# Altium PCB kk_sem_ultrahang_hw.PcbDoc
Units mil, origin at the board's own origin, x right, y up, seen from the top; angles counter-clockwise.
Board outline 3600 x 2100 mil, 2 copper layers (Top Layer, Bottom Layer); 45 components, 27 nets, 118 pads, 18 vias.
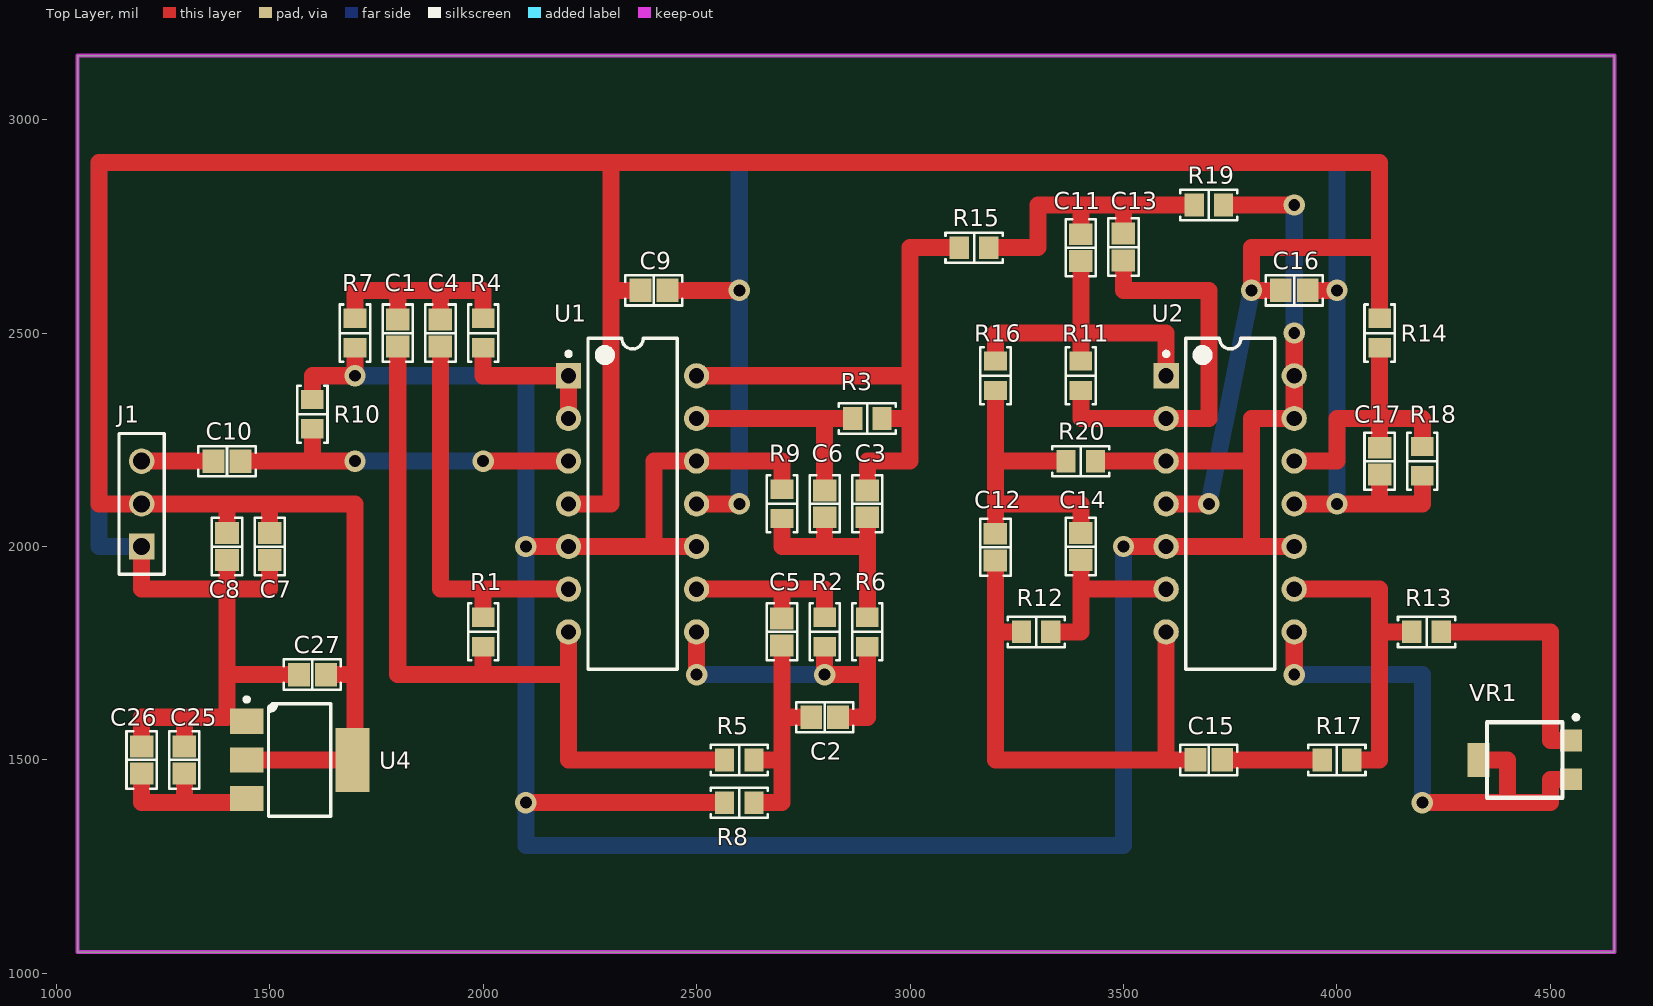
[diagram p0: Top Layer view]
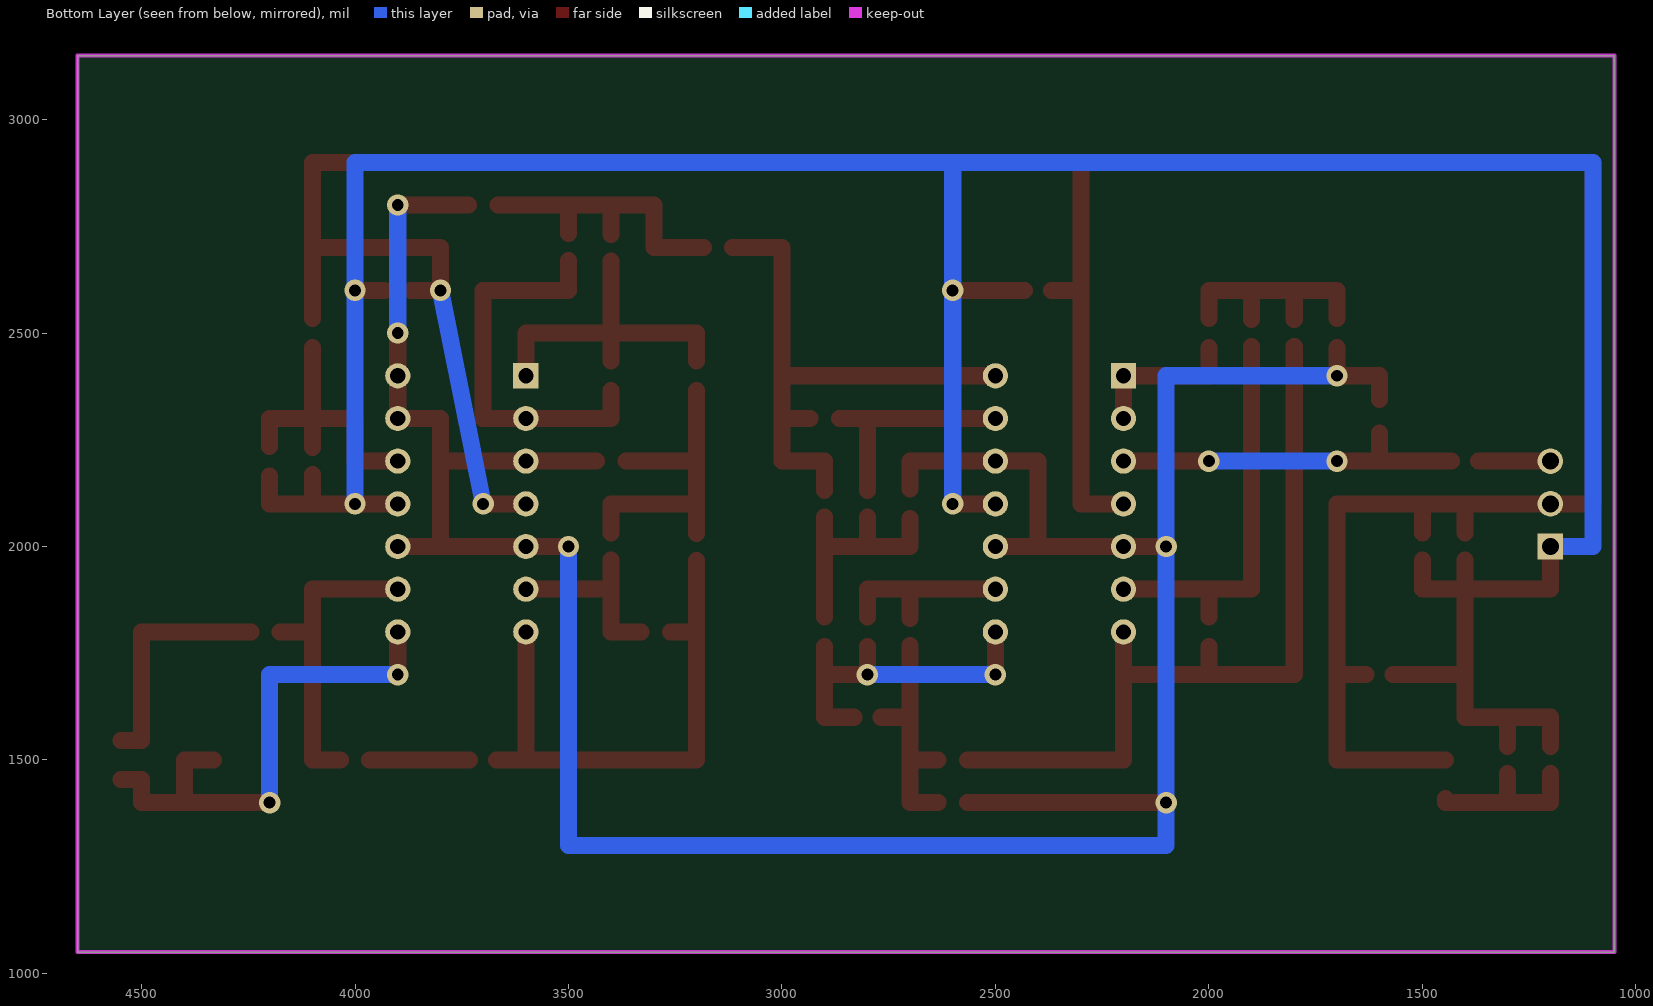
[diagram p1: Bottom Layer view, seen from below]
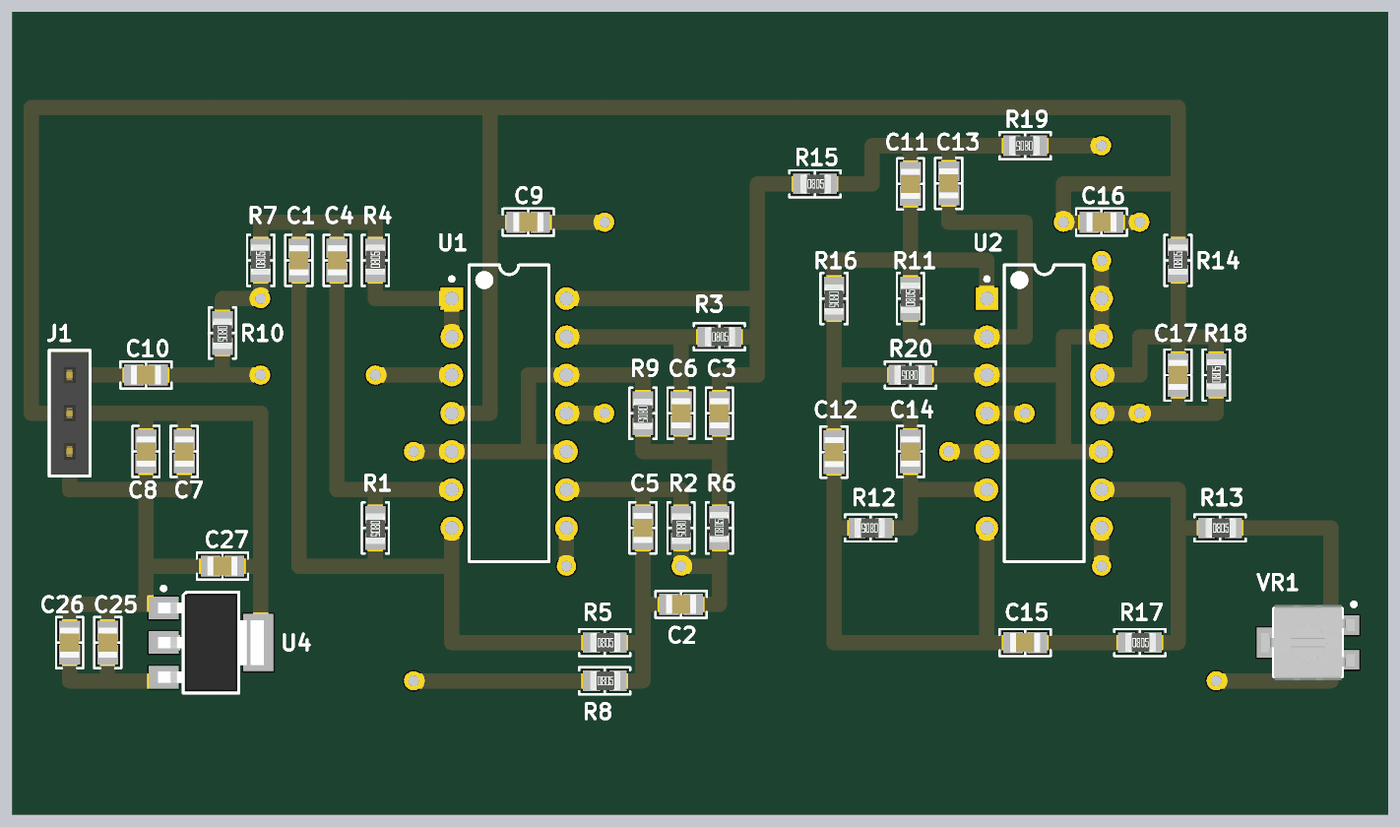
[diagram p2: 3D render of the assembled board from above, using the file's embedded part models]

## Layer stack, top to bottom
Top Solder: solder mask 0.4, Solder Resist, Dk 3.5
Top Layer: signal copper 1.4
Dielectric 1: dielectric 12.6, FR-4, Dk 4.8
Bottom Layer: signal copper 1.4
Bottom Solder: solder mask 0.4, Solder Resist, Dk 3.5

## Board outline
1050,1050 1050,3150 4650,3150 4650,1050

## Design rules (kind name [scope] priority, off if disabled: settings)
Clearance [All] p1: gap=10 ignorepadtopadclearanceinfootprint=FALSE except(0: Arc-Hole Track-Hole SMDPad-Hole THPad-Hole Via-Hole Fill-Hole Poly-Hole Region-Hole Text-Hole)
PolygonConnect [All] p1: connectstyle=Relief reliefconductorwidth=10 reliefentries=4 polygonreliefangle="90 Angle" airgapwidth=10
RoutingVias [All] p1: holewidth=28 width=50 viastyle="Through Hole" minholewidth=28 minwidth=50 maxholewidth=28 maxwidth=50
SolderMaskExpansion [All] p1: expansion=4 istentingtop=FALSE
Width [All] p1: maxlimit=40 minlimit=20 preferedwidth=40 minimp=50.000000 maximp=50.000000 favimp=50.000000
30 further rules are at their usual default settings.

## Components (designator, comment, footprint, x,y, rotation, side; value= is the part's Value field where it differs from the comment)
C1 "1nF" "CAP 0805_2012" 1800,2500 r270 top
C2 "1nF" "CAP 0805_2012" 2800,1600 r0 top
C3 "1nF" "CAP 0805_2012" 2900,2100 r90 top
C4 "1nF" "CAP 0805_2012" 1900,2500 r270 top
C5 "1nF" "CAP 0805_2012" 2700,1800 r90 top
C6 "1nF" "CAP 0805_2012" 2800,2100 r90 top
C7 "1µF" "CAP 0805_2012" 1500,2000 r90 top
C8 "100nF" "CAP 0805_2012" 1400,2000 r90 top
C9 "100nF" "CAP 0805_2012" 2400,2600 r180 top
C10 "1nF" "CAP 0805_2012" 1400,2200 r0 top
C11 "1nF" "CAP 0805_2012" 3400,2700 r270 top
C12 "1nF" "CAP 0805_2012" 3200,1998.5 r270 top
C13 "1nF" "CAP 0805_2012" 3500,2701.5 r270 top
C14 "1nF" "CAP 0805_2012" 3400,2000 r270 top
C15 "100nF" "CAP 0805_2012" 3700,1500 r180 top
C16 "100nF" "CAP 0805_2012" 3900,2600 r180 top
C17 "100nF" "CAP 0805_2012" 4100,2200 r90 top
C25 "10µF" "CAP 0805_2012" 1300,1500 r270 top
C26 "100nF" "CAP 0805_2012" 1200,1500 r270 top
C27 "10µF" "CAP 0805_2012" 1600,1700 r0 top
J1 "MIC" 61300311821 1200,2100 r90 top
R1 "16 kOhms" "RES 0805_2012" 2000,1800 r270 top
R2 "27 kOhms" "RES 0805_2012" 2800,1800 r270 top
R3 "39 kOhms" "RES 0805_2012" 2900,2300 r0 top
R4 "2.4 kOhms" "RES 0805_2012" 2000,2500 r90 top
R5 "6.8 kOhms" "RES 0805_2012" 2600,1500 r0 top
R6 "2.7 kOhms" "RES 0805_2012" 2900,1800 r90 top
R7 "1.1 kOhms" "RES 0805_2012" 1700,2500 r90 top
R8 "820 Ohms" "RES 0805_2012" 2600,1400 r0 top
R9 "150 Ohms" "RES 0805_2012" 2700,2100 r270 top
R10 "10 kOhms" "RES 0805_2012" 1600,2310 r270 top
R11 "91 kOhms" "RES 0805_2012" 3400,2400 r90 top
R12 "16 kOhms" "RES 0805_2012" 3295.55,1800 r180 top
R13 "1 kOhms" "RES 0805_2012" 4210,1800 r0 top
R14 "10 kOhms" "RES 0805_2012" 4100,2500 r90 top
R15 "6.2 kOhms" "RES 0805_2012" 3150,2700 r0 top
R16 "1.6 kOhms" "RES 0805_2012" 3200,2400 r270 top
R17 "1 kOhms" "RES 0805_2012" 4000,1500 r0 top
R18 "10 kOhms" "RES 0805_2012" 4200,2200 r90 top
R19 "330 Ohms" "RES 0805_2012" 3700,2800 r180 top
R20 "620 Ohms" "RES 0805_2012" 3400,2200 r180 top
U1 "TL974IN" TI-N14 2350,2100 r0 top
U2 "TL974IN" TI-N14 3750,2100 r0 top
U4 "LD1117S33TR" "ST SOT-223" 1570,1500 r0 top
VR1 "10 kOhms" "Bourns 3314G-1" 4440,1500 r270 top

## Footprints (in the part's own frame and the unit in brackets; to place one, negate y for a bottom-side part, rotate by r counter-clockwise, add the part's x,y. Pads: shape width x height; smd on the part's side, far side on the other; paste and mask are expansions set on the pad)
61300311821 [mm] "Socket Header, Pitch 2.54 mm, THT, Vertical, single row, 3p"
  rect 1.52x1.52 hole 1.02: 1(-2.54,0)
  round 1.52 hole 1.02: 2(0,0) 3(2.54,0)
  silkscreen extent -4.19,-1.35 4.19,1.35, body extent -4.06,-1.25 4.06,1.25, height 8.55
"Bourns 3314G-1" [mm]
  rect 1.3x1.3 smd: 1(-1.15,2.75) 3(1.15,2.75)
  rect 2x1.3 smd: 2(0,-2.75)
  silkscreen extent -2.67,-2.25 2.25,3.17, body extent -2.5,-3.1 2.5,3.1, height 2.7
"CAP 0805_2012" [mm] "Chip Capacitor, 2-Leads, Body 2.00x1.20mm, IPC Medium Density"
  rect 1.3x1.4 smd: 1(-0.8,0) 2(0.8,0)
  silkscreen extent -1.7,-0.9 1.7,0.9, body extent -1,-0.64 1,0.64, height 1.26
"RES 0805_2012" [mm] "Chip Resistor, 2-Leads, Body 2.00x1.25mm, IPC Medium Density"
  rect 1.15x1.35 smd: 1(-0.875,0) 2(0.875,0)
  silkscreen extent -1.7,-0.9 1.7,0.9, body extent -0.95,-0.62 1.05,0.63, height 0.6
"ST SOT-223" [mm] "SOT223, 4-Leads, Body 6.50x7.00mm (avg), Pitch 2.30mm, IPC Medium Density"
  rect 2x1.5 smd: 1(-3.15,2.3) 2(-3.15,0) 3(-3.15,-2.3)
  rect 2x3.8 smd: 4(3.15,0)
  silkscreen extent -3.27,-3.35 1.85,3.72, body extent -3.52,-3.25 3.5,3.25, height 1.8
TI-N14 [mm] "DIP, 14-Leads, Body 19.305x6.35 mm, Pitch 2.54 mm"
  rect 1.5x1.5 hole 0.9: 1(-3.81,7.62)
  round 1.5 hole 0.9: 2(-3.81,5.08) 3(-3.81,2.54) 4(-3.81,0) 5(-3.81,-2.54) 6(-3.81,-5.08) 7(-3.81,-7.62) 8(3.81,-7.62) 9(3.81,-5.08) 10(3.81,-2.54) 11(3.81,0) 12(3.81,2.54) 13(3.81,5.08) 14(3.81,7.62)
  silkscreen extent -3.93,-9.85 2.65,9.85, body extent -3.3,-9.85 3.3,9.85, height 5.08

## Part data
C1 C2 C3 C4 C5 C6 C10 C11 C12 C13 C14: library part C0805C102K5GACTU, "CAP CER 1000PF 50V C0G/NP0 0805", Capacitance=1000pF, Device Package="0805 (2012 Metric)", Manufacturer=KEMET, Operating Temperature="-55°C ~ 125°C", Supplier Part Number 1=399-7988-1-ND, Temperature Coefficient="C0G, NP0", Tolerance=±10%, Voltage - Rated=50V, Applications="General Purpose", ComponentLink1Description=Datasheet, ComponentLink1URL=https://api.kemet.com/component-edge/download/datasheet/C0805C102K5GACTU.pdf, ComponentLink2Description="DigiKey Link", ComponentLink2URL=http://digikey.com/product-detail/en/kemet/C0805C102K5GACTU/399-7988-1-ND/3471711, Features="Low ESL", LastUpdated="2020. 09. 02. 1:04:42", Lifecycle Status=Active, Minimum Order=1, Mounting Type="Surface Mount, MLCC", Package / Case="0805 (2012 Metric)", Packaging=TapeAndReel, Part Number=C0805C102K5GACTU, Part Status=Active, PartId=2543, Price=0.02, Series="SMD Comm C0G", Size / Dimension="0.079\" L x 0.049\" W (2.00mm x 1.25mm)", Supplier 1=DigiKey, Thickness (Max)="0.035\" (0.88mm)"
C7: library part C0805C105K4RACTU, "CAP CER 1UF 16V X7R 0805", Device Package="0805 (2012 Metric)", Manufacturer=KEMET, Operating Temperature="-55°C ~ 125°C", Supplier Part Number 1=399-1284-1-ND, Temperature Coefficient=X7R, Tolerance=±10%, Voltage - Rated=16V, Applications="Bypass, Decoupling", Capacitance=1µF, ComponentLink1Description=Datasheet, ComponentLink1URL=https://api.kemet.com/component-edge/download/datasheet/C0805C105K4RACTU.pdf, ComponentLink2Description="DigiKey Link", ComponentLink2URL=http://digikey.com/product-detail/en/kemet/C0805C105K4RACTU/399-1284-1-ND/416060, LastUpdated="2020. 09. 02. 1:04:42", Lifecycle Status=Active, Minimum Order=1, Mounting Type="Surface Mount, MLCC", Package / Case="0805 (2012 Metric)", Packaging=TapeAndReel, Part Number=C0805C105K4RACTU, Part Status=Active, PartId=2494, Price=0.02, Series="SMD Comm X7R", Size / Dimension="0.079\" L x 0.049\" W (2.00mm x 1.25mm)", Supplier 1=DigiKey, Thickness (Max)="0.039\" (1.00mm)"
C8 C9 C15 C16 C17 C26: library part CC0805MRX7R9BB104, "CAP CER 0.1UF 50V X7R 0805", Capacitance=0.1µF, Device Package="0805 (2012 Metric)", Manufacturer=Yageo, Operating Temperature="-55°C ~ 125°C", Supplier Part Number 1=311-4351-1-ND, Temperature Coefficient=X7R, Tolerance=±20%, Voltage - Rated=50V, Applications="General Purpose", ComponentLink1Description=Datasheet, ComponentLink1URL=https://www.yageo.com/upload/media/product/productsearch/datasheet/mlcc/UPY-GPHC_X7R_6.3V-to-50V_18.pdf, ComponentLink2Description="DigiKey Link", ComponentLink2URL=http://digikey.com/product-detail/en/yageo/CC0805MRX7R9BB104/311-4351-1-ND/8025440, LastUpdated="2020. 09. 02. 1:04:42", Lifecycle Status=Active, Minimum Order=1, Mounting Type="Surface Mount, MLCC", Package / Case="0805 (2012 Metric)", Packaging=TapeAndReel, Part Number=CC0805MRX7R9BB104, Part Status=Active, PartId=2475, Price=0.02, Series=CC, Size / Dimension="0.079\" L x 0.049\" W (2.00mm x 1.25mm)", Supplier 1=DigiKey, Thickness (Max)="0.037\" (0.95mm)"
C25 C27: library part CGA4J1X5R1C106K125AC, "CAP CER 10UF 16V X5R 0805", Device Package="0805 (2012 Metric)", Manufacturer="TDK Corporation", Operating Temperature="-55°C ~ 85°C", Ratings=AEC-Q200, Supplier Part Number 1=445-7883-1-ND, Temperature Coefficient=X5R, Tolerance=±10%, Voltage - Rated=16V, Applications=Automotive, Capacitance=10µF, ComponentLink1Description=Datasheet, ComponentLink1URL=https://product.tdk.com/info/en/catalog/datasheets/mlcc_automotive_general_en.pdf?ref_disty=digikey, ComponentLink2Description="DigiKey Link", ComponentLink2URL=http://digikey.com/product-detail/en/tdk-corporation/CGA4J1X5R1C106K125AC/445-7883-1-ND/2781387, LastUpdated="2020. 09. 02. 1:04:41", Lifecycle Status=Active, Minimum Order=1, Mounting Type="Surface Mount, MLCC", Package / Case="0805 (2012 Metric)", Packaging=TapeAndReel, Part Number=CGA4J1X5R1C106K125AC, Part Status=Active, PartId=3076, Price=0.11, Series=CGA, Size / Dimension="0.079\" L x 0.049\" W (2.00mm x 1.25mm)", Supplier 1=DigiKey, Thickness (Max)="0.057\" (1.45mm)"
J1: library part 61300311821, "WR-PHD Socket Header, THT, pitch 2.54mm, Single Row, Vertical, 3p", Contact Resistance=20mOhm, Manufacturer="Wurth Elektronik", Operating Temperature="-40 to +125degC", Rated Current=3A, Withstanding Voltage=500VAC, Working Voltage=250VAC, ComponentLink1Description=Manufacturer, ComponentLink1URL=http://www.we-online.de, ComponentLink2Description=Datasheet, ComponentLink2URL=https://www.we-online.com/catalog/datasheet/61300311821.pdf, Gender="Socket Header", Manufacturer Part Number=61300311821, Mounting Technology=THT, Orientation=Vertical, Packaging=Tray, Pin Number=3, Pitch=2.54mm, Published Date="May 2020", Row Number=Single
R1 R12: library part CRCW080516K0FKEA, "RES SMD 16K OHM 1% 1/8W 0805", Device Package="0805 (2012 Metric)", Manufacturer="Vishay Dale", Operating Temperature="-55°C ~ 155°C", Power (Watts)="0.125W, 1/8W", Ratings=AEC-Q200, Supplier Device Package=0805, Supplier Part Number 1=541-16.0KCCT-ND, Temperature Coefficient=±100ppm/°C, Tolerance=±1%, ComponentLink1Description=Datasheet, ComponentLink1URL=http://www.vishay.com/docs/20035/dcrcwe3.pdf, ComponentLink2Description="DigiKey Link", ComponentLink2URL=http://digikey.com/product-detail/en/vishay-dale/CRCW080516K0FKEA/541-16.0KCCT-ND/1180918, Composition="Thick Film", Features="Automotive AEC-Q200", Height - Seated (Max)="0.020\" (0.50mm)", LastUpdated="2020. 09. 02. 1:15:13", Lifecycle Status=Active, Minimum Order=1, Number of Terminations=2, Package / Case="0805 (2012 Metric)", Packaging=TapeAndReel, Part Number=CRCW080516K0FKEA, Part Status=Active, PartId=32798, Price=0.01, Resistance="16 kOhms", Series=CRCW, Size / Dimension="0.079\" L x 0.049\" W (2.00mm x 1.25mm)", Supplier 1=DigiKey
R2: library part ERJ-6ENF2702V, "RES SMD 27K OHM 1% 1/8W 0805", Device Package="0805 (2012 Metric)", Manufacturer="Panasonic Electronic Components", Operating Temperature="-55°C ~ 155°C", Power (Watts)="0.125W, 1/8W", Ratings=AEC-Q200, Supplier Device Package=0805, Supplier Part Number 1=P27.0KCCT-ND, Temperature Coefficient=±100ppm/°C, Tolerance=±1%, ComponentLink1Description=Datasheet, ComponentLink1URL=https://industrial.panasonic.com/cdbs/www-data/pdf/RDA0000/AOA0000C304.pdf, ComponentLink2Description="DigiKey Link", ComponentLink2URL=http://digikey.com/product-detail/en/panasonic-electronic-components/ERJ-6ENF2702V/P27.0KCCT-ND/1746843, Composition="Thick Film", Features="Automotive AEC-Q200", Height - Seated (Max)="0.028\" (0.70mm)", LastUpdated="2020. 09. 02. 1:15:19", Lifecycle Status=Active, Minimum Order=1, Number of Terminations=2, Package / Case="0805 (2012 Metric)", Packaging=TapeAndReel, Part Number=ERJ-6ENF2702V, Part Status=Active, PartId=30271, Price=0.01, Resistance="27 kOhms", Series=ERJ, Size / Dimension="0.079\" L x 0.049\" W (2.00mm x 1.25mm)", Supplier 1=DigiKey
R3: library part AC0805FR-0739KL, "RES SMD 39K OHM 1% 1/8W 0805", Device Package="0805 (2012 Metric)", Manufacturer=Yageo, Operating Temperature="-55°C ~ 155°C", Power (Watts)="0.125W, 1/8W", Ratings=AEC-Q200, Supplier Device Package=0805, Supplier Part Number 1=YAG3727CT-ND, Temperature Coefficient=±100ppm/°C, Tolerance=±1%, ComponentLink1Description=Datasheet, ComponentLink1URL=https://www.yageo.com/upload/media/product/productsearch/datasheet/rchip/PYu-AC_51_RoHS_L_7.pdf, ComponentLink2Description="DigiKey Link", ComponentLink2URL=http://digikey.com/product-detail/en/yageo/AC0805FR-0739KL/YAG3727CT-ND/6006576, Composition="Thick Film", Features="Automotive AEC-Q200, Moisture Resistant", Height - Seated (Max)="0.024\" (0.60mm)", LastUpdated="2020. 09. 02. 1:15:24", Lifecycle Status=Active, Minimum Order=1, Number of Terminations=2, Package / Case="0805 (2012 Metric)", Packaging=TapeAndReel, Part Number=AC0805FR-0739KL, Part Status=Active, PartId=27853, Price=0.01, Resistance="39 kOhms", Series=AC, Size / Dimension="0.079\" L x 0.049\" W (2.00mm x 1.25mm)", Supplier 1=DigiKey
R4: library part KTR10EZPF2401, "RES SMD 2.4K OHM 1% 1/8W 0805", Device Package="0805 (2012 Metric)", Manufacturer="Rohm Semiconductor", Operating Temperature="-55°C ~ 155°C", Power (Watts)="0.125W, 1/8W", Ratings=AEC-Q200, Supplier Device Package=0805, Supplier Part Number 1=RHM2.4KAHCT-ND, Temperature Coefficient=±100ppm/°C, Tolerance=±1%, ComponentLink1Description=Datasheet, ComponentLink1URL=https://www.rohm.com/datasheet/KTR03EZPF/ktr-e, ComponentLink2Description="DigiKey Link", ComponentLink2URL=http://digikey.com/product-detail/en/rohm-semiconductor/KTR10EZPF2401/RHM2.4KAHCT-ND/4054431, Composition="Thick Film", Features="Automotive AEC-Q200, High Voltage", Height - Seated (Max)="0.026\" (0.65mm)", LastUpdated="2020. 09. 02. 1:15:21", Lifecycle Status=Active, Minimum Order=1, Number of Terminations=2, Package / Case="0805 (2012 Metric)", Packaging=TapeAndReel, Part Number=KTR10EZPF2401, Part Status=Active, PartId=29182, Price=0.02, Resistance="2.4 kOhms", Series=KTR, Size / Dimension="0.079\" L x 0.049\" W (2.00mm x 1.25mm)", Supplier 1=DigiKey
R5: library part ERJ-6ENF6801V, "RES SMD 6.8K OHM 1% 1/8W 0805", Device Package="0805 (2012 Metric)", Manufacturer="Panasonic Electronic Components", Operating Temperature="-55°C ~ 155°C", Power (Watts)="0.125W, 1/8W", Ratings=AEC-Q200, Supplier Device Package=0805, Supplier Part Number 1=P6.80KCCT-ND, Temperature Coefficient=±100ppm/°C, Tolerance=±1%, ComponentLink1Description=Datasheet, ComponentLink1URL=https://industrial.panasonic.com/cdbs/www-data/pdf/RDA0000/AOA0000C304.pdf, ComponentLink2Description="DigiKey Link", ComponentLink2URL=http://digikey.com/product-detail/en/panasonic-electronic-components/ERJ-6ENF6801V/P6.80KCCT-ND/1746892, Composition="Thick Film", Features="Automotive AEC-Q200", Height - Seated (Max)="0.028\" (0.70mm)", LastUpdated="2020. 09. 02. 1:15:19", Lifecycle Status=Active, Minimum Order=1, Number of Terminations=2, Package / Case="0805 (2012 Metric)", Packaging=TapeAndReel, Part Number=ERJ-6ENF6801V, Part Status=Active, PartId=30159, Price=0.01, Resistance="6.8 kOhms", Series=ERJ, Size / Dimension="0.079\" L x 0.049\" W (2.00mm x 1.25mm)", Supplier 1=DigiKey
R6: library part CR0805-FX-2701ELF, "RES SMD 2.7K OHM 1% 1/8W 0805", Device Package="0805 (2012 Metric)", Manufacturer="Bourns Inc.", Operating Temperature="-55°C ~ 155°C", Power (Watts)="0.125W, 1/8W", Supplier Device Package=0805, Supplier Part Number 1=CR0805-FX-2701ELFCT-ND, Temperature Coefficient=±100ppm/°C, Tolerance=±1%, ComponentLink1Description=Datasheet, ComponentLink1URL=https://www.bourns.com/docs/Product-Datasheets/CHPREZTR.pdf, ComponentLink2Description="DigiKey Link", ComponentLink2URL=http://digikey.com/product-detail/en/bourns-inc/CR0805-FX-2701ELF/CR0805-FX-2701ELFCT-ND/4247920, Composition="Thick Film", Features="Moisture Resistant", Height - Seated (Max)="0.024\" (0.60mm)", LastUpdated="2020. 09. 02. 1:15:14", Lifecycle Status=Active, Minimum Order=1, Number of Terminations=2, Package / Case="0805 (2012 Metric)", Packaging=CutTape, Part Number=CR0805-FX-2701ELF, Part Status=Active, PartId=32518, Price=0.10, Resistance="2.7 kOhms", Series=CR0805, Size / Dimension="0.079\" L x 0.049\" W (2.00mm x 1.25mm)", Supplier 1=DigiKey
R7: library part RMCF0805FG1K10, "RES 1.1K OHM 1% 1/8W 0805", Device Package="0805 (2012 Metric)", Manufacturer="Stackpole Electronics Inc", Operating Temperature="-55°C ~ 155°C", Power (Watts)="0.125W, 1/8W", Ratings=AEC-Q200, Supplier Device Package=0805, Supplier Part Number 1=RMCF0805FG1K10CT-ND, Temperature Coefficient=±100ppm/°C, Tolerance=±1%, ComponentLink1Description=Datasheet, ComponentLink1URL=https://www.seielect.com/catalog/sei-rmcf_rmcp.pdf, ComponentLink2Description="DigiKey Link", ComponentLink2URL=http://digikey.com/product-detail/en/stackpole-electronics-inc/RMCF0805FG1K10/RMCF0805FG1K10CT-ND/4425147, Composition="Thick Film", Features="Automotive AEC-Q200", Height - Seated (Max)="0.026\" (0.65mm)", LastUpdated="2020. 09. 02. 1:15:22", Lifecycle Status=Active, Minimum Order=1, Number of Terminations=2, Package / Case="0805 (2012 Metric)", Packaging=CutTape, Part Number=RMCF0805FG1K10, Part Status=Active, PartId=28907, Price=0.10, Resistance="1.1 kOhms", Series=RMCF, Size / Dimension="0.079\" L x 0.049\" W (2.00mm x 1.25mm)", Supplier 1=DigiKey
R8: library part RMCF0805FT820R, "RES 820 OHM 1% 1/8W 0805", Device Package="0805 (2012 Metric)", Manufacturer="Stackpole Electronics Inc", Operating Temperature="-55°C ~ 155°C", Power (Watts)="0.125W, 1/8W", Ratings=AEC-Q200, Supplier Device Package=0805, Supplier Part Number 1=RMCF0805FT820RCT-ND, Temperature Coefficient=±100ppm/°C, Tolerance=±1%, ComponentLink1Description=Datasheet, ComponentLink1URL=https://www.seielect.com/catalog/sei-rmcf_rmcp.pdf, ComponentLink2Description="DigiKey Link", ComponentLink2URL=http://digikey.com/product-detail/en/stackpole-electronics-inc/RMCF0805FT820R/RMCF0805FT820RCT-ND/2418471, Composition="Thick Film", Features="Automotive AEC-Q200", Height - Seated (Max)="0.026\" (0.65mm)", LastUpdated="2020. 09. 02. 1:15:14", Lifecycle Status=Active, Minimum Order=1, Number of Terminations=2, Package / Case="0805 (2012 Metric)", Packaging=CutTape, Part Number=RMCF0805FT820R, Part Status=Active, PartId=32515, Price=0.10, Resistance="820 Ohms", Series=RMCF, Size / Dimension="0.079\" L x 0.049\" W (2.00mm x 1.25mm)", Supplier 1=DigiKey
R9: library part RMCF0805FT150R, "RES 150 OHM 1% 1/8W 0805", Device Package="0805 (2012 Metric)", Manufacturer="Stackpole Electronics Inc", Operating Temperature="-55°C ~ 155°C", Power (Watts)="0.125W, 1/8W", Ratings=AEC-Q200, Supplier Device Package=0805, Supplier Part Number 1=RMCF0805FT150RCT-ND, Temperature Coefficient=±100ppm/°C, Tolerance=±1%, ComponentLink1Description=Datasheet, ComponentLink1URL=https://www.seielect.com/catalog/sei-rmcf_rmcp.pdf, ComponentLink2Description="DigiKey Link", ComponentLink2URL=http://digikey.com/product-detail/en/stackpole-electronics-inc/RMCF0805FT150R/RMCF0805FT150RCT-ND/1942337, Composition="Thick Film", Features="Automotive AEC-Q200", Height - Seated (Max)="0.026\" (0.65mm)", LastUpdated="2020. 09. 02. 1:15:14", Lifecycle Status=Active, Minimum Order=1, Number of Terminations=2, Package / Case="0805 (2012 Metric)", Packaging=CutTape, Part Number=RMCF0805FT150R, Part Status=Active, PartId=32414, Price=0.10, Resistance="150 Ohms", Series=RMCF, Size / Dimension="0.079\" L x 0.049\" W (2.00mm x 1.25mm)", Supplier 1=DigiKey
R10 R14 R18: library part CRGCQ0805F10K, "CRGCQ 0805 10K 1%", Device Package="0805 (2012 Metric)", Manufacturer="TE Connectivity Passive Product", Operating Temperature="-55°C ~ 155°C", Power (Watts)="0.125W, 1/8W", Ratings=AEC-Q200, Supplier Device Package=0805, Supplier Part Number 1=A129761CT-ND, Temperature Coefficient=±100ppm/°C, Tolerance=±1%, ComponentLink1Description=Datasheet, ComponentLink1URL=https://www.te.com/commerce/DocumentDelivery/DDEController?Action=srchrtrv&DocNm=1773204-3&DocType=DS&DocLang=English, ComponentLink2Description="DigiKey Link", ComponentLink2URL=http://digikey.com/product-detail/en/te-connectivity-passive-product/CRGCQ0805F10K/A129761CT-ND/8577593, Composition="Thick Film", Features="Automotive AEC-Q200, Moisture Resistant", Height - Seated (Max)="0.026\" (0.65mm)", LastUpdated="2020. 09. 02. 1:14:36", Lifecycle Status=Active, Minimum Order=1, Number of Terminations=2, Package / Case="0805 (2012 Metric)", Packaging=TapeAndReel, Part Number=CRGCQ0805F10K, Part Status=Active, PartId=47653, Price=0.01, Resistance="10 kOhms", Series=CRGCQ, Size / Dimension="0.079\" L x 0.049\" W (2.00mm x 1.25mm)", Supplier 1=DigiKey
R11: library part CRCW080591K0FKEA, "RES SMD 91K OHM 1% 1/8W 0805", Device Package="0805 (2012 Metric)", Manufacturer="Vishay Dale", Operating Temperature="-55°C ~ 155°C", Power (Watts)="0.125W, 1/8W", Ratings=AEC-Q200, Supplier Device Package=0805, Supplier Part Number 1=541-91.0KCCT-ND, Temperature Coefficient=±100ppm/°C, Tolerance=±1%, ComponentLink1Description=Datasheet, ComponentLink1URL=http://www.vishay.com/docs/20035/dcrcwe3.pdf, ComponentLink2Description="DigiKey Link", ComponentLink2URL=http://digikey.com/product-detail/en/vishay-dale/CRCW080591K0FKEA/541-91.0KCCT-ND/1181009, Composition="Thick Film", Features="Automotive AEC-Q200", Height - Seated (Max)="0.020\" (0.50mm)", LastUpdated="2020. 09. 02. 1:15:06", Lifecycle Status=Active, Minimum Order=1, Number of Terminations=2, Package / Case="0805 (2012 Metric)", Packaging=TapeAndReel, Part Number=CRCW080591K0FKEA, Part Status=Active, PartId=35946, Price=0.01, Resistance="91 kOhms", Series=CRCW, Size / Dimension="0.079\" L x 0.049\" W (2.00mm x 1.25mm)", Supplier 1=DigiKey
R13 R17: library part CRCW08051K00FKEA, "RES SMD 1K OHM 1% 1/8W 0805", Device Package="0805 (2012 Metric)", Manufacturer="Vishay Dale", Operating Temperature="-55°C ~ 155°C", Power (Watts)="0.125W, 1/8W", Ratings=AEC-Q200, Supplier Device Package=0805, Supplier Part Number 1=541-1.00KCCT-ND, Temperature Coefficient=±100ppm/°C, Tolerance=±1%, ComponentLink1Description=Datasheet, ComponentLink1URL=http://www.vishay.com/docs/20035/dcrcwe3.pdf, ComponentLink2Description="DigiKey Link", ComponentLink2URL=http://digikey.com/product-detail/en/vishay-dale/CRCW08051K00FKEA/541-1.00KCCT-ND/1180783, Composition="Thick Film", Features="Automotive AEC-Q200", Height - Seated (Max)="0.020\" (0.50mm)", LastUpdated="2020. 09. 02. 1:15:23", Lifecycle Status=Active, Minimum Order=1, Number of Terminations=2, Package / Case="0805 (2012 Metric)", Packaging=TapeAndReel, Part Number=CRCW08051K00FKEA, Part Status=Active, PartId=28103, Price=0.01, Resistance="1 kOhms", Series=CRCW, Size / Dimension="0.079\" L x 0.049\" W (2.00mm x 1.25mm)", Supplier 1=DigiKey
R15: library part RMCF0805FT6K20, "RES 6.2K OHM 1% 1/8W 0805", Device Package="0805 (2012 Metric)", Manufacturer="Stackpole Electronics Inc", Operating Temperature="-55°C ~ 155°C", Power (Watts)="0.125W, 1/8W", Ratings=AEC-Q200, Supplier Device Package=0805, Supplier Part Number 1=RMCF0805FT6K20CT-ND, Temperature Coefficient=±100ppm/°C, Tolerance=±1%, ComponentLink1Description=Datasheet, ComponentLink1URL=https://www.seielect.com/catalog/sei-rmcf_rmcp.pdf, ComponentLink2Description="DigiKey Link", ComponentLink2URL=http://digikey.com/product-detail/en/stackpole-electronics-inc/RMCF0805FT6K20/RMCF0805FT6K20CT-ND/2418453, Composition="Thick Film", Features="Automotive AEC-Q200", Height - Seated (Max)="0.026\" (0.65mm)", LastUpdated="2020. 09. 02. 1:15:14", Lifecycle Status=Active, Minimum Order=1, Number of Terminations=2, Package / Case="0805 (2012 Metric)", Packaging=CutTape, Part Number=RMCF0805FT6K20, Part Status=Active, PartId=32585, Price=0.10, Resistance="6.2 kOhms", Series=RMCF, Size / Dimension="0.079\" L x 0.049\" W (2.00mm x 1.25mm)", Supplier 1=DigiKey
R16: library part AC0805FR-071K6L, "RES SMD 1.6K OHM 1% 1/8W 0805", Device Package="0805 (2012 Metric)", Manufacturer=Yageo, Operating Temperature="-55°C ~ 155°C", Power (Watts)="0.125W, 1/8W", Ratings=AEC-Q200, Supplier Device Package=0805, Supplier Part Number 1=YAG5709CT-ND, Temperature Coefficient=±100ppm/°C, Tolerance=±1%, ComponentLink1Description=Datasheet, ComponentLink1URL=https://www.yageo.com/upload/media/product/productsearch/datasheet/rchip/PYu-AC_51_RoHS_L_7.pdf, ComponentLink2Description="DigiKey Link", ComponentLink2URL=http://digikey.com/product-detail/en/yageo/AC0805FR-071K6L/YAG5709CT-ND/7648586, Composition="Thick Film", Features="Automotive AEC-Q200, Moisture Resistant", Height - Seated (Max)="0.024\" (0.60mm)", LastUpdated="2020. 09. 02. 1:15:15", Lifecycle Status=Active, Minimum Order=1, Number of Terminations=2, Package / Case="0805 (2012 Metric)", Packaging=TapeAndReel, Part Number=AC0805FR-071K6L, Part Status=Active, PartId=31712, Price=0.01, Resistance="1.6 kOhms", Series=AC, Size / Dimension="0.079\" L x 0.049\" W (2.00mm x 1.25mm)", Supplier 1=DigiKey
R19: library part RC0805FR-07330RL, "RES SMD 330 OHM 1% 1/8W 0805", Device Package="0805 (2012 Metric)", Manufacturer=Yageo, Operating Temperature="-55°C ~ 155°C", Power (Watts)="0.125W, 1/8W", Supplier Device Package=0805, Supplier Part Number 1=311-330CRCT-ND, Temperature Coefficient=±100ppm/°C, Tolerance=±1%, ComponentLink1Description=Datasheet, ComponentLink1URL=https://www.yageo.com/upload/media/product/productsearch/datasheet/rchip/PYu-RC_Group_51_RoHS_L_10.pdf, ComponentLink2Description="DigiKey Link", ComponentLink2URL=http://digikey.com/product-detail/en/yageo/RC0805FR-07330RL/311-330CRCT-ND/730813, Composition="Thick Film", Features="Moisture Resistant", Height - Seated (Max)="0.024\" (0.60mm)", LastUpdated="2020. 09. 02. 1:15:14", Lifecycle Status=Active, Minimum Order=1, Number of Terminations=2, Package / Case="0805 (2012 Metric)", Packaging=CutTape, Part Number=RC0805FR-07330RL, Part Status=Active, PartId=32600, Price=0.10, Resistance="330 Ohms", Series=RC, Size / Dimension="0.079\" L x 0.049\" W (2.00mm x 1.25mm)", Supplier 1=DigiKey
R20: library part KTR10EZPF6200, "RES SMD 620 OHM 1% 1/8W 0805", Device Package="0805 (2012 Metric)", Manufacturer="Rohm Semiconductor", Operating Temperature="-55°C ~ 155°C", Power (Watts)="0.125W, 1/8W", Ratings=AEC-Q200, Supplier Device Package=0805, Supplier Part Number 1=RHM620AHCT-ND, Temperature Coefficient=±100ppm/°C, Tolerance=±1%, ComponentLink1Description=Datasheet, ComponentLink1URL=https://www.rohm.com/datasheet/KTR03EZPF/ktr-e, ComponentLink2Description="DigiKey Link", ComponentLink2URL=http://digikey.com/product-detail/en/rohm-semiconductor/KTR10EZPF6200/RHM620AHCT-ND/4054660, Composition="Thick Film", Features="Automotive AEC-Q200, High Voltage", Height - Seated (Max)="0.026\" (0.65mm)", LastUpdated="2020. 09. 02. 1:15:20", Lifecycle Status=Active, Minimum Order=1, Number of Terminations=2, Package / Case="0805 (2012 Metric)", Packaging=TapeAndReel, Part Number=KTR10EZPF6200, Part Status=Active, PartId=29654, Price=0.02, Resistance="620 Ohms", Series=KTR, Size / Dimension="0.079\" L x 0.049\" W (2.00mm x 1.25mm)", Supplier 1=DigiKey
U1 U2: "Output Rail-To-Rail Very-Low-Noise Operational Amplifier, 2.7 to 12 V, -40 to 125 degC, 14-pin DIP (N14), Pb-Free (RoHS)", Manufacturer="Texas Instruments", Rating=Catalog, Supplier Part Number 1=TL974IN-ND, Total Supply Voltage(Max)(+5V is 5, +/-5V is 10)=12, Total Supply Voltage(Min)(+5V is 5, +/-5V is 10)=2.7, CMRR(Min)(dB)=60, Code_JEDEC=MS-001, ComponentLink1Description="Manufacturer URL", ComponentLink1URL=http://www.ti.com/, ComponentLink2Description=Datasheet, ComponentLink2URL=http://www.ti.com/lit/ds/symlink/tl974.pdf, ComponentLink3Description="Package Specification", ComponentLink3URL=http://www.ti.com/lit/ml/mpdi002c/mpdi002c.pdf, DatasheetVersion=SLOS467G, Eco-Plan="Pb-Free (RoHS)", GBW(Typ)(MHz)=12, IIB(Max)(pA)=750000, Iq per channel(Max)(mA)=2.8, Mounting Technology="Through Hole", Number of Channels=4, Offset Drift(Typ)(uV/C)=5, PackageDescription="14-Pin Plastic In-Line, Body 19.305 x 6.35 mm, Pitch 2.54 mm", PackageReference=N14, PackageVersion="4040049/E, 12/2002", PartNumber=TL974IN, Slew Rate(Typ)(V/us)=5, Sub Family="General Purpose Amplifier, Low Supply Voltage Amplifier (<=2.7V)", Supplier 1=Digi-Key, Supplier 2=Newark, Supplier 3=Mouser, Supplier Part Number 2=14M2463, Supplier Part Number 3=595-TL974IN, Vio (25C)(Max)(mV)=4
U4: "IC REG LINEAR 3.3V 800MA SOT223", Current - Output=800mA, Current - Quiescent (Iq)=10mA, Manufacturer=STMicroelectronics, Package / Case="TO-261-4, TO-261AA", Supplier Device Package=SOT-223, Supplier Part Number 1=497-1242-1-ND, Voltage - Input (Max)=15V, Voltage - Output (Min/Fixed)=3.3V, Voltage Dropout (Max)="1.2V @ 800mA", ComponentLink1Description=Datasheet, ComponentLink1URL=http://www.st.com/content/ccc/resource/technical/document/datasheet/99/3b/7d/91/91/51/4b/be/CD00000544.pdf/files/CD00000544.pdf/jcr:content/translations/en.CD00000544.pdf, ComponentLink2Description="DigiKey Link", ComponentLink2URL=http://digikey.com/product-detail/en/stmicroelectronics/LD1117S33TR/497-1242-1-ND/586242, LastUpdated="2020. 09. 02. 1:24:39", Lifecycle Status=Active, Minimum Order=1, Mounting Type="Surface Mount", Number of Regulators=1, Output Configuration=Positive, Output Type=Fixed, Packaging=TapeAndReel, Part Number=LD1117S33TR, Part Status=Active, Price=0.14, Protection Features="Over Current, Over Temperature", PSRR="75dB (120Hz)", Series=-, Supplier 1=DigiKey
VR1: library part "Bourns 3314G-1", "Bourns 3314G-1"

## Via types
v1: diameter 50, hole 28, Top Layer to Bottom Layer, 18 vias

## Nets (pads, with @x,y where several pads share a name; then routed paths per layer and width w, separated by ;. In a path a pad name is that pad's centre, name@x,y a point inside that pad or via, vN(x,y) a via of type N, cw(c..) or ccw(c..) an arc to the next point about the centre after c; other vN are vias at no path point)
+5: C25.2 C26.2 U4.3 | length 392.4
  Top Layer w40: C26.2 1200,1400 1300,1400 ; C25.2 1300,1400 ; U4.3 1445.98,1400 1300,1400
ADC: U2.8 VR1.2 VR1.3 | length 1271.3
  Top Layer w40: v1(3900,1700) U2.8 ; v1(4200,1400) 4400,1400 ; VR1.2 4400,1500 4400,1400 ; VR1.3 4500,1454.72 4500,1400 4400,1400
  Bottom Layer w40: v1(3900,1700) 4200,1700 v1(4200,1400)
AVCC: C7.2 C8.2 C9.2 C16.2 C27.2 J1.2 R14.2 U1.4 U2.4 U4.2 U4.4 | length 7872
  Top Layer w40: C8.2 1400,2100 ; U4.2 U4.4 1700,1500 1700,1700 ; C7.2 1500,2100 ; C27.2 1700,1700 ; U1.4 2300,2100 2300,2600 ; C9.2 2300,2600 ; U2.4 v1(3700,2100) ; C16.2 v1(3800,2600) 3800,2700 4100,2700 ; R14.2 4100,2700 ; 1400,2100 1500,2100 ; 1400,2100 J1.2 1100,2100 1100,2900 2300,2900 ; 1500,2100 1700,2100 1700,1700 ; 2300,2600 2300,2900 ; 2300,2900 4100,2900 4100,2700
  Bottom Layer w40: v1(3700,2100) v1(3800,2600)
GND: C7.1 C8.1 C9.1 C16.1 C17.1 C25.1 C26.1 C27.1 J1.1 R18.1 U1.11 U2.11 U4.1 | length 7613.6
  Top Layer w40: C26.1 1200,1600 1300,1600 ; J1.1 1200,1900 1400,1900 ; C25.1 1300,1600 ; C8.1 1400,1900 ; C7.1 1500,1900 1400,1900 ; C27.1 1400,1700 ; C9.1 v1(2600,2600) ; U1.11 v1(2600,2100) ; U2.11 v1(4000,2100) 4100,2100 ; C16.1 v1(4000,2600) ; C17.1 4100,2100 ; R18.1 4200,2100 4100,2100 ; 1300,1600 1400,1600 1400,1700 ; 1400,1700 1400,1900
  Bottom Layer w40: J1.1 1100,2000 1100,2900 2600,2900 ; v1(2600,2100) v1(2600,2600) 2600,2900 ; v1(4000,2100) v1(4000,2600) 4000,2900 2600,2900
NetC1_1: C1.1 C4.1 R4.2 R7.2 | length 568.1
  Top Layer w40: R7.2 1700,2600 1800,2600 ; C1.1 1800,2600 ; C4.1 1900,2600 ; R4.2 2000,2600 1900,2600 ; 1800,2600 1900,2600
NetC1_2: C1.2 R1.2 R5.1 U1.7 | length 1899.6
  Top Layer w40: C1.2 1800,1700 2000,1700 ; R1.2 2000,1700 ; U1.7 2200,1700 ; R5.1 2200,1500 2200,1700 ; 2000,1700 2200,1700
NetC2_1: C2.1 C5.1 R5.2 R8.2 | length 568.1
  Top Layer w40: R8.2 2700,1400 2700,1500 ; R5.2 2700,1500 ; C5.1 2700,1600 ; C2.1 2700,1600 ; 2700,1500 2700,1600
NetC2_2: C2.2 R2.2 R6.1 U1.8 | length 799.6
  Top Layer w40: v1(2500,1700) U1.8 ; R2.2 v1(2800,1700) 2900,1700 ; C2.2 2900,1600 2900,1700 ; R6.1 2900,1700
  Bottom Layer w40: v1(2500,1700) v1(2800,1700)
NetC3_1: C3.1 C6.1 R6.2 R9.2 | length 568.1
  Top Layer w40: R9.2 2700,2000 2800,2000 ; C6.1 2800,2000 ; R6.2 2900,2000 ; C3.1 2900,2000 ; 2800,2000 2900,2000
NetC3_2: C3.2 R3.2 R15.1 U1.14 | length 1349.6
  Top Layer w40: U1.14 3000,2400 ; C3.2 2900,2200 3000,2200 3000,2300 ; R3.2 3000,2300 ; R15.1 3000,2700 3000,2400 ; 3000,2300 3000,2400
NetC4_2: C4.2 R1.1 U1.6 | length 934.1
  Top Layer w40: C4.2 1900,1900 2000,1900 ; R1.1 2000,1900 ; U1.6 2000,1900
NetC5_2: C5.2 R2.1 U1.9 | length 434.1
  Top Layer w40: U1.9 2700,1900 ; C5.2 2700,1900 ; R2.1 2800,1900 2700,1900
NetC6_2: C6.2 R3.1 U1.13 | length 534.1
  Top Layer w40: U1.13 2800,2300 ; C6.2 2800,2300 ; R3.1 2800,2300
NetC10_1: C10.1 J1.3 | length 168.5
  Top Layer w40: J1.3 C10.1
NetC10_2: C10.2 R10.2 U1.3 | length 834.1
  Top Layer w40: C10.2 1600,2200 ; R10.2@1600,2265.55 1600,2200 ; v1(1700,2200) 1600,2200 ; v1(2000,2200) U1.3
  Bottom Layer w40: v1(1700,2200) v1(2000,2200)
NetC11_1: C11.1 C13.1 R15.2 R19.2 | length 716.6
  Top Layer w40: R15.2 3300,2700 3300,2800 3400,2800 ; C11.1 3400,2800 ; C13.1 3500,2800 ; R19.2 3500,2800 ; 3400,2800 3500,2800
NetC11_2: C11.2 R11.2 R16.1 U2.1 | length 799.6
  Top Layer w40: R16.1 3200,2500 3400,2500 ; R11.2 3400,2500 ; C11.2 3400,2500 ; U2.1 3600,2500 3400,2500
NetC12_1: C12.1 C14.1 R16.2 R20.2 | length 769.6
  Top Layer w40: C12.1 3200,2100 ; R16.2 3200,2200 ; R20.2 3200,2200 ; C14.1 3400,2100 3200,2100 ; 3200,2100 3200,2200
NetC12_2: C12.2 C15.2 R12.2 U2.7 | length 1296.6
  Top Layer w40: C12.2 3200,1800 ; R12.2 3200,1800 ; U2.7 3600,1500 ; C15.2 3600,1500 ; 3200,1800 3200,1500 3600,1500
NetC13_2: C13.2 R11.1 U2.2 | length 935.6
  Top Layer w40: R11.1 3400,2300 U2.2 3700,2300 3700,2600 3500,2600 C13.2
NetC14_2: C14.2 R12.1 U2.6 | length 438.5
  Top Layer w40: R12.1 3400,1800 3400,1900 ; C14.2 3400,1900 ; U2.6 3400,1900
NetC15_1: C15.1 R17.1 | length 234.1
  Top Layer w40: C15.1 R17.1
NetC17_2: C17.2 R14.1 R18.2 U2.12 | length 699.6
  Top Layer w40: U2.12 4000,2200 4000,2300 4100,2300 ; C17.2 4100,2300 ; R14.1 4100,2300 ; R18.2 4200,2300 4100,2300
NetR4_1: R4.1 U1.1 U1.2 | length 365.6
  Top Layer w40: R4.1 2000,2400 U1.1 U1.2
NetR13_1: R13.1 R17.2 U2.9 | length 741.1
  Top Layer w40: U2.9 4100,1900 4100,1800 ; R17.2 4100,1500 4100,1800 ; R13.1 4100,1800
NetR13_2: R13.2 VR1.1 | length 558.5
  Top Layer w40: R13.2 4500,1800 4500,1545.28 VR1.1
REF: R7.1 R8.1 R9.1 R10.1 R19.1 R20.1 U1.5 U1.10 U1.12 U2.3 U2.5 U2.10 U2.13 U2.14 | length 7083.3
  Top Layer w40: R10.1 1600,2400 v1(1700,2400) R7.1 ; v1(2100,1400) R8.1 ; v1(2100,2000) U1.5 2400,2000 ; U1.10 2400,2000 ; R9.1 2700,2200 U1.12 2400,2200 2400,2000 ; R20.1 U2.3 3800,2200 ; v1(3500,2000) U2.5 3800,2000 ; R19.1 v1(3900,2800) ; U2.10 3800,2000 ; v1(3900,2500) U2.14 U2.13 3800,2300 3800,2200 ; 3800,2000 3800,2200
  Bottom Layer w40: v1(1700,2400) 2100,2400 v1(2100,2000) v1(2100,1400) 2100,1300 3500,1300 v1(3500,2000) ; v1(3900,2500) v1(3900,2800)

## Keep-outs
Keep-Out Layer:
  the board outline again, w10

## Silkscreen, mask and mechanical layers (free items; w line width, h text height)
Mechanical 1:
  drawing of 756 lines, arcs and shapes, not listed